# EAGLE board *LED_MATRIX_TOP1 (EAGLE 7.2.0)
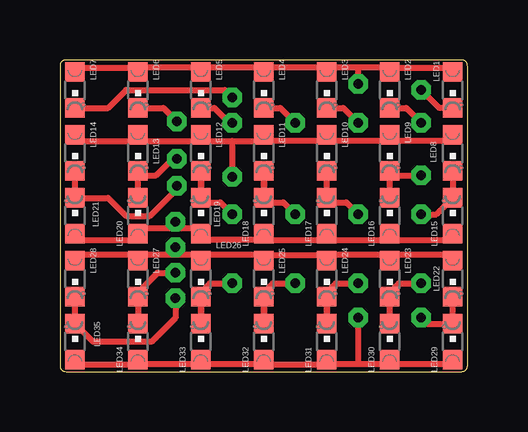
[diagram p0: board, top side]
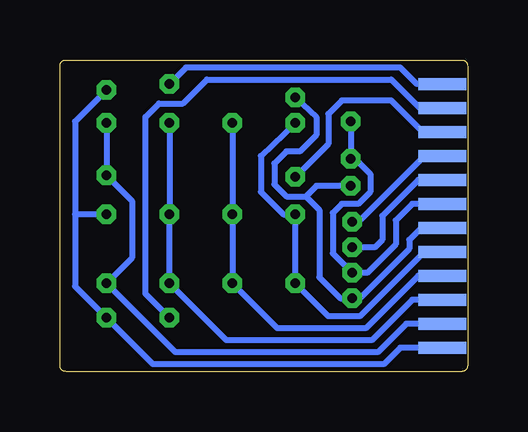
[diagram p1: board, bottom side, seen from below]

Size 17 x 13 mm. Coordinates in mm from the lower left corner, seen from the top.
Outline: 0,0.25 arc90 0.25,0 16.75,0 arc90 17,0.25 17,12.75 arc90 16.75,13 0.25,13 arc90 0,12.75 0,0.25
Copper layers (1*16): Top 0.035mm / dielectric 1.5mm / Bottom 0.035mm
Design rules "Bilex DRU *": minimum track width 10mil, minimum drill 24mil, track to track 10mil, track to pad 10mil, pad to pad 10mil, via to via 10mil, smd to smd 10mil, copper to edge 1mil, drill to drill 8mil, minimum pad ring 10mil, minimum via ring 8mil, stop-mask expansion 4mil, vias tented up to drill 0mil, thermal gap 10mil

## Footprints (pad centres in the part's own frame; a part is rotated, then mirrored left to right if it is on the bottom)
CHIPLED_0603 = smd 0.8 x 0.8: A 0,-0.75; C 0,0.75
FFC12/1MM = smd 2 x 0.5: P$1 0,5.5; P$2 0,4.5; P$3 0,3.5; P$4 0,2.5; P$5 0,1.5; P$6 0,0.5; P$7 0,-0.5; P$8 0,-1.5; P$9 0,-2.5; P$10 0,-3.5; P$11 0,-4.5; P$12 0,-5.5

## Placement (x,y rotation side)
LED1  [CHIPLED_0603]  16.38,11.75 180 top
LED2  [CHIPLED_0603]  13.75,11.75 180 top
LED3  [CHIPLED_0603]  11.12,11.75 180 top
LED4  [CHIPLED_0603]  8.5,11.75 180 top
LED5  [CHIPLED_0603]  5.88,11.75 180 top
LED6  [CHIPLED_0603]  3.25,11.75 180 top
LED7  [CHIPLED_0603]  0.62,11.75 180 top
LED8  [CHIPLED_0603]  16.38,9.12 180 top
LED9  [CHIPLED_0603]  13.75,9.12 180 top
LED10  [CHIPLED_0603]  11.12,9.12 180 top
LED11  [CHIPLED_0603]  8.5,9.12 180 top
LED12  [CHIPLED_0603]  5.88,9.12 180 top
LED13  [CHIPLED_0603]  3.25,9.12 180 top
LED14  [CHIPLED_0603]  0.62,9.12 180 top
LED15  [CHIPLED_0603]  16.38,6.5 0 top
LED16  [CHIPLED_0603]  13.75,6.5 0 top
LED17  [CHIPLED_0603]  11.12,6.5 0 top
LED18  [CHIPLED_0603]  8.5,6.5 0 top
LED19  [CHIPLED_0603]  5.88,6.5 0 top
LED20  [CHIPLED_0603]  3.25,6.5 0 top
LED21  [CHIPLED_0603]  0.62,6.5 0 top
LED22  [CHIPLED_0603]  16.38,3.88 180 top
LED23  [CHIPLED_0603]  13.75,3.88 180 top
LED24  [CHIPLED_0603]  11.12,3.88 180 top
LED25  [CHIPLED_0603]  8.5,3.88 180 top
LED26  [CHIPLED_0603]  5.88,3.88 180 top
LED27  [CHIPLED_0603]  3.25,3.88 180 top
LED28  [CHIPLED_0603]  0.62,3.88 180 top
LED29  [CHIPLED_0603]  16.38,1.25 0 top
LED30  [CHIPLED_0603]  13.75,1.25 0 top
LED31  [CHIPLED_0603]  11.12,1.25 0 top
LED32  [CHIPLED_0603]  8.5,1.25 0 top
LED33  [CHIPLED_0603]  5.88,1.25 0 top
LED34  [CHIPLED_0603]  3.25,1.25 0 top
LED35  [CHIPLED_0603]  0.62,1.25 0 top
U$1  PINHD_12  [FFC12/1MM]  1.06,6.5 0 bottom

## Library data of the parts
LED1-LED35 = led
U$1 = thar

## Nets
N$38: LED1.A LED2.A LED3.A LED4.A LED5.A LED6.A LED7.A U$1.P$1
N$39: LED8.A LED9.A LED10.A LED11.A LED12.A LED13.A LED14.A U$1.P$3
N$40: LED15.A LED16.A LED17.A LED18.A LED19.A LED20.A LED21.A U$1.P$4
N$41: LED22.A LED23.A LED24.A LED25.A LED26.A LED27.A LED28.A U$1.P$5
N$42: LED29.A LED30.A LED31.A LED32.A LED33.A LED34.A LED35.A U$1.P$2
N$43: LED1.C LED8.C LED15.C LED22.C LED29.C U$1.P$12
N$44: LED2.C LED9.C LED16.C LED23.C LED30.C U$1.P$11
N$45: LED3.C LED10.C LED17.C LED24.C LED31.C U$1.P$10
N$46: LED4.C LED11.C LED18.C LED25.C LED32.C U$1.P$9
N$47: LED5.C LED12.C LED19.C LED26.C LED33.C U$1.P$8
N$48: LED6.C LED13.C LED20.C LED27.C LED34.C U$1.P$6
N$49: LED7.C LED14.C LED21.C LED28.C LED35.C U$1.P$7

## Tracks (layer width: path | path; a pad name or v marks a point on that pad's centre or on a via)
N$38  (via drill 0.4)
  Top 0.254: 13.75,12.69 12.44,12.69 | 12.44,12.69 11.12,12.69 | LED3.A 11.12,12.69 | 11.12,12.69 8.5,12.69 | LED4.A 8.5,12.69 | 8.5,12.69 5.88,12.69 | LED5.A 5.88,12.69 | 5.88,12.69 3.25,12.69 | LED7.A 0.62,12.69 3.25,12.69 | 3.25,12.69 LED6.A | LED2.A 13.75,12.69 | 13.75,12.69 16.38,12.69 LED1.A | v12.44,12 12.44,12.69
  Bottom 0.254: U$1.P$1 2.12,12 2.81,12.69 11.75,12.69 v12.44,12
N$39  (via drill 0.4)
  Top 0.254: LED14.A 0.62,9.63 3.25,9.63 | LED13.A 3.25,9.63 | 3.25,9.63 5.88,9.63 | 11.12,9.63 8.5,9.63 | 13.75,9.63 11.12,9.63 | 11.12,9.63 LED10.A | LED8.A 16.38,9.63 13.75,9.63 | 13.75,9.63 LED9.A | LED12.A 5.88,9.63 | 5.88,9.63 7.19,9.63 | 7.19,9.63 8.5,9.63 | 8.5,9.63 LED11.A | v7.19,8.13 7.19,9.63
  Bottom 0.254: v7.19,8.13 5.81,9.5 5.81,10.75 5.25,11.31 3.19,11.31 1.88,10 U$1.P$3
N$40  (via drill 0.4)
  Top 0.254: LED21.A 0.69,5.5 3.25,5.5 LED20.A 3.25,6 4.81,6 | 4.81,6 5.88,6 LED19.A 5.88,5.5 8.44,5.5 | 8.44,5.5 LED18.A 8.5,5.69 8.44,5.5 | 8.44,5.5 11.19,5.5 | LED17.A 11.19,5.5 | 11.19,5.5 13.69,5.5 13.75,5.69 LED16.A 13.75,5.5 16.38,5.5 LED15.A | 4.81,6 v4.81,6.25
  Bottom 0.254: U$1.P$4 1.75,9 1.88,8.94 4.56,6.25 v4.81,6.25
N$41  (via drill 0.4)
  Top 0.254: 13.75,4.88 LED23.A 13.62,4.69 13.75,4.88 | 13.75,4.88 11.12,4.88 11,4.69 LED24.A 11.12,4.69 11.06,4.88 8.56,4.88 8.5,4.69 LED25.A 8.5,4.88 5.81,4.88 | LED22.A 16.38,4.69 16.31,4.88 13.75,4.88 | 5.81,4.88 4.81,4.88 | 4.81,4.88 3.12,4.88 | 3.12,4.88 0.88,4.88 LED28.A | LED27.A 3.25,4.75 3.12,4.88 | LED26.A 5.88,4.81 5.81,4.88 | v4.81,5.19 4.81,4.88
  Bottom 0.254: U$1.P$5 2.06,8 3.56,6.5 3.56,5.5 3.88,5.19 v4.81,5.19
N$42  (via drill 0.4)
  Top 0.254: LED29.A 16.38,0.31 13.75,0.31 | LED30.A 13.75,0.31 | 13.75,0.31 12.44,0.31 | 12.44,0.31 11.12,0.31 | LED31.A 11.12,0.31 | LED32.A 8.5,0.31 | 8.5,0.31 5.88,0.31 | 5.88,0.31 3.25,0.31 | LED34.A 3.25,0.31 | LED35.A 0.62,0.31 3.25,0.31 | LED33.A 5.88,0.31 | 8.5,0.31 11.12,0.31 | 12.44,0.31 v12.44,2.25
  Bottom 0.254: v12.44,2.25 13.44,3.25 13.44,10.63 12.88,11.19 11.88,11.19 10.88,12.19 3.19,12.19 2,11 U$1.P$2
N$43  (via drill 0.4)
  Top 0.254: LED22.C LED29.C 15.31,2 v15.06,2.25 | LED1.C 15.81,11 v15.06,11.75 | LED8.C LED15.C | LED15.C 16.38,7.06 | v15.06,6.56 15.69,6.56 LED15.C
  Bottom 0.254: v15.06,11.75 16.38,10.44 16.38,6.56 | 16.38,6.56 16.38,3.56 v15.06,2.25 13.12,0.31 3.5,0.31 2.81,1 U$1.P$12 | v15.06,6.56 16.38,6.56
N$44  (via drill 0.4)
  Top 0.254: LED23.C LED30.C 13.75,3.31 14.12,3.69 v15.06,3.69 | 13.75,8.19 LED9.C | LED2.C 14.44,11 v15.06,10.38 | LED16.C 13.75,8.19 | 13.75,8.19 v15.06,8.19
  Bottom 0.254: v15.06,10.38 v15.06,8.19 14,7.13 14,4.75 v15.06,3.69 12.19,0.81 3.75,0.81 2.56,2 U$1.P$11
N$45  (via drill 0.4)
  Top 0.254: LED10.C LED17.C 11.12,7.06 11.94,7.06 v12.44,6.56 | LED24.C LED31.C 11.12,3.31 11.5,3.69 v12.44,3.69 | LED3.C 11.81,11 v12.44,10.38
  Bottom 0.254: v12.44,10.38 v12.44,6.56 v12.44,3.69 10.06,1.31 4,1.31 2.31,3 U$1.P$10
N$46  (via drill 0.4)
  Top 0.254: LED25.C LED32.C 8.5,3.31 8.88,3.69 v9.81,3.69 | LED18.C LED11.C 8.5,7.06 9.31,7.06 v9.81,6.56 | LED4.C 9.19,11 v9.81,10.38
  Bottom 0.254: v9.81,10.38 v9.81,6.56 v9.81,3.69 7.94,1.81 4.25,1.81 2.06,4 U$1.P$9
N$47  (via drill 0.4)
  Top 0.254: LED19.C LED12.C 5.88,7.06 6.69,7.06 v7.19,6.56 | LED26.C LED33.C 5.88,3.31 6.25,3.69 v7.19,3.69 | LED5.C 6.44,11 7.06,10.38 v7.19,10.38
  Bottom 0.254: U$1.P$8 1.81,5 4.5,2.31 5.81,2.31 v7.19,3.69 v7.19,6.56 7.69,6.56 8.62,7.5 8.62,9 v7.19,10.38
N$48  (via drill 0.4)
  Top 0.254: LED20.C LED13.C 3.19,8.19 4,8.19 4.69,8.88 v4.88,8.88 | LED34.C LED27.C 3.25,3.31 4.06,4.13 v4.81,4.13 | LED6.C 4.31,11 v4.88,10.44
  Bottom 0.254: v4.88,10.44 v4.88,8.88 4.69,8.88 4.06,8.25 4.06,7.5 4.56,7 5.25,7 5.62,6.63 5.62,4.94 v4.81,4.13 4.19,4.13 3,5.31 3,6.31 2.31,7 U$1.P$6
N$49  (via drill 0.4)
  Top 0.254: LED21.C LED14.C | 0.62,3.31 LED28.C LED35.C 1.38,1.25 3.81,1.25 4.81,2.25 v4.81,3.06 | 0.81,7.06 LED21.C | LED7.C 2,11 2.75,11.75 6.88,11.75 v7.19,11.44 | LED21.C 2,7.25 2.75,6.5 3.75,6.5 4.88,7.63 v4.88,7.75
  Bottom 0.254: U$1.P$7 1.94,6 2.44,5.5 2.44,5.13 4.5,3.06 v4.81,3.06 5.31,3.06 6.19,3.94 6.19,6.75 6.75,7.31 | v7.19,11.44 6.31,10.63 6.31,9.88 7,9.19 7.56,9.19 8.06,8.69 8.06,7.81 7.56,7.31 6.75,7.31 | v4.88,7.75 6.31,7.75 6.75,7.31